# Altium PCB PCB.PcbDoc
Units mil, origin at the board's own origin, x right, y up, seen from the top; angles counter-clockwise.
Board outline 3543.31 x 954.33 mil, 2 copper layers (Top Layer, Bottom Layer); 6 components, 6 nets, 20 pads, 0 vias.
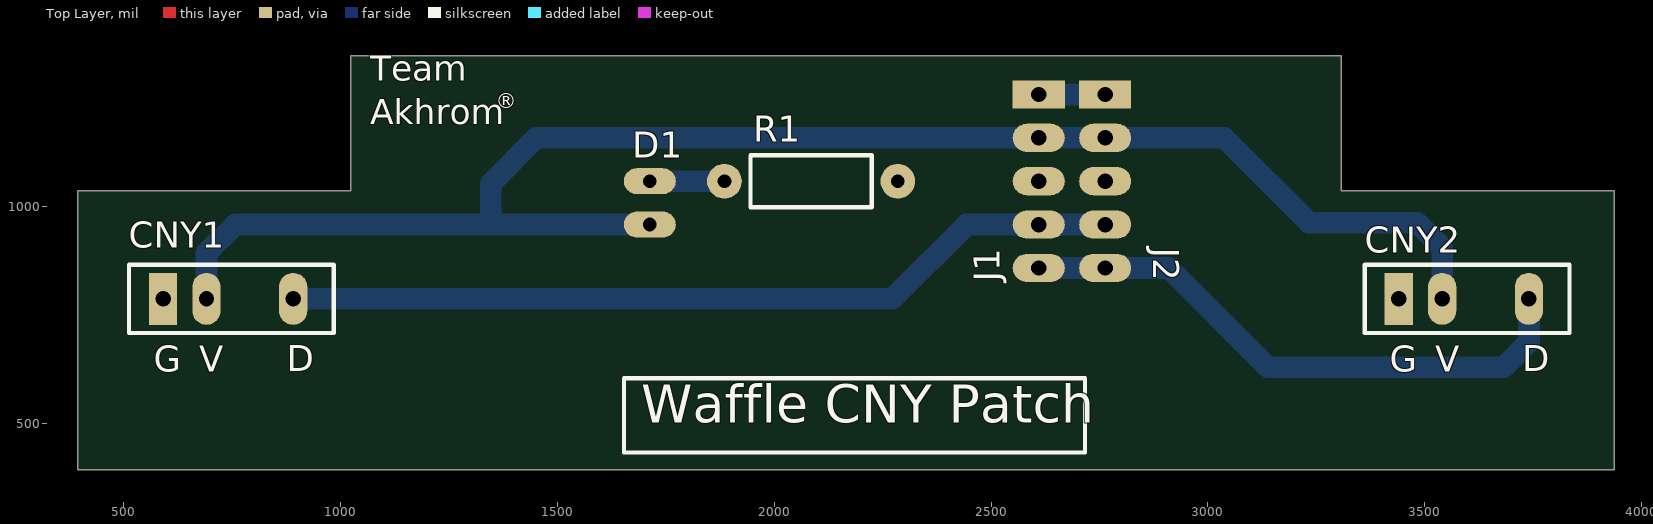
[diagram p0: Top Layer view]
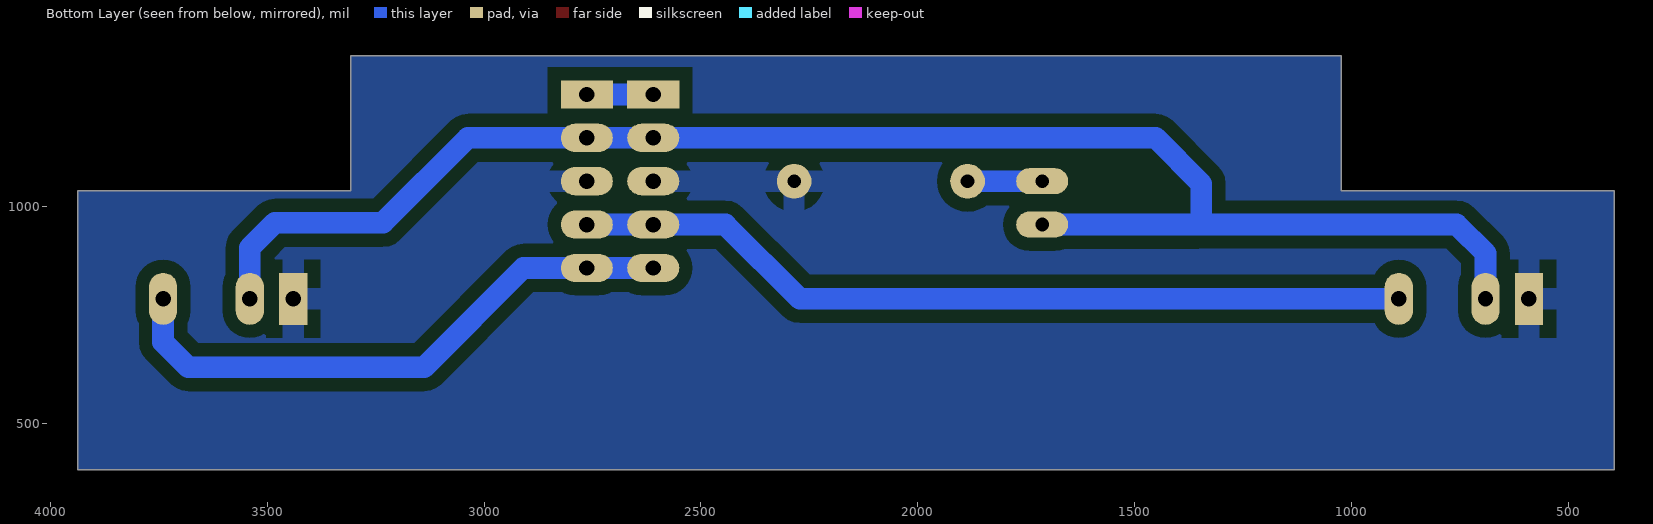
[diagram p1: Bottom Layer view, seen from below]
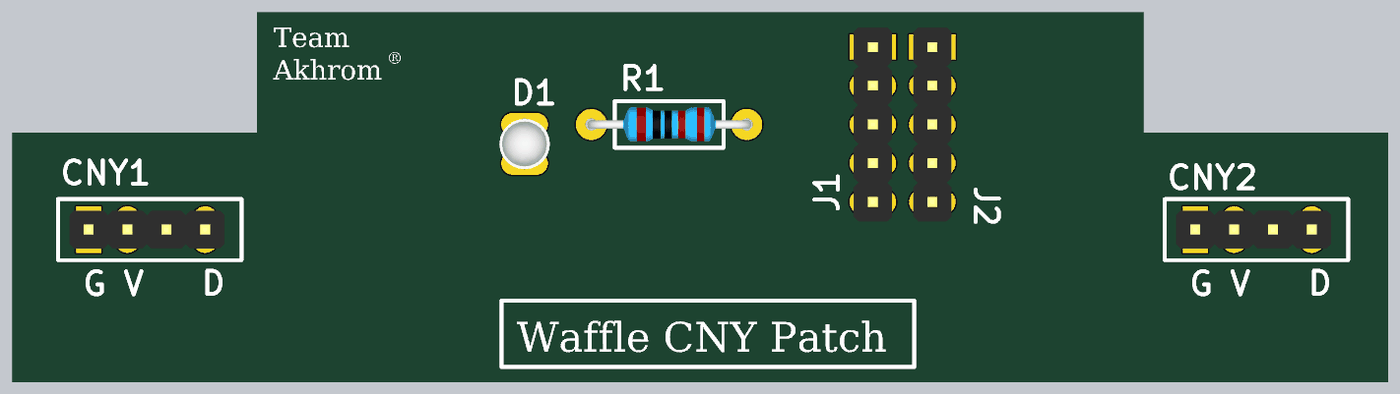
[diagram p2: 3D render of the assembled board from above, using the file's embedded part models]

## Layer stack, top to bottom
Top Solder: solder mask 0.4, Solder Resist, Dk 3.5
Top Layer: signal copper 1.4
Dielectric 1: dielectric 12.6, FR-4, Dk 4.8
Bottom Layer: signal copper 1.4
Bottom Solder: solder mask 0.4, Solder Resist, Dk 3.5

## Board outline
393.7,393.7 393.7,1037.01 1023.62,1037.01 1023.62,1348.03 3307.09,1348.03 3307.09,1037.01 3937.01,1037.01 3937.01,393.7

## Design rules (kind name [scope] priority, off if disabled: settings)
Clearance [All] p1: gap=30
PlaneConnect [All] p1: planeconnectstyle=Relief reliefexpansion=20 reliefentries=4 reliefconductorwidth=30 reliefairgap=30
PolygonConnect [All] p1: connectstyle=Relief reliefconductorwidth=50 reliefentries=4 polygonreliefangle="90 Angle" airgapwidth=30
RoutingVias [All] p1: holewidth=28 width=50 viastyle="Through Hole" minholewidth=28 minwidth=50 maxholewidth=28 maxwidth=50
SolderMaskExpansion [All] p1: expansion=4
Width [All] p1: maxlimit=50 minlimit=30 preferedwidth=30
29 further rules are at their usual default settings.

## Components (designator, comment, footprint, x,y, rotation, side; value= is the part's Value field where it differs from the comment)
CNY1 "CNY_HEADER" CNY_HEADER 740.55,787.4 r90 top
CNY2 "CNY_HEADER" CNY_HEADER 3590.16,787.4 r90 top
D1 "LED" LED-3MM-RED 1712.99,1008.66 r90 top
J1 "PICkit" "Header 1x5" 2609.84,1258.66 r0 top
J2 "PICkit" "Header 1x5" 2762.99,1258.66 r0 top
R1 "RES" RES-Axial-400mil 2285.04,1058.66 r180 top

## Footprints (in the part's own frame and the unit in brackets; to place one, negate y for a bottom-side part, rotate by r counter-clockwise, add the part's x,y. Pads: shape width x height; smd on the part's side, far side on the other; paste and mask are expansions set on the pad)
CNY_HEADER [mil]
  rect 120x65 hole 35.43: 1(0,150)
  oval 120x65 hole 35.43: 2(0,50) 3(0,-150)
  body extent -49,-200 49,200, height 336
"Header 1x5" [mil]
  rect 120x65 hole 35.43: 1(0,0)
  oval 120x65 hole 35.43: 2(0,-100) 3(0,-200) 4(0,-300) 5(0,-400)
  body extent -49,-450 49,50, height 336
LED-3MM-RED [mil]
  oval 60x120 hole 31.5: A(-50,0) K(50,0)
  body extent -66,-65 64,65, height 217
RES-Axial-400mil [mil]
  round 80 hole 31.5: 1(0,0) 2(400,0)
  silkscreen extent 60,-60 340,60, body extent -12,-44 410,44, height 94

## Nets (pads, with @x,y where several pads share a name; then routed paths per layer and width w, separated by ;. In a path a pad name is that pad's centre, name@x,y a point inside that pad or via, vN(x,y) a via of type N, cw(c..) or ccw(c..) an arc to the next point about the centre after c; other vN are vias at no path point)
CNY1: CNY1.3 J1.4 J2.4 | length 1943.4
  Bottom Layer w50: CNY1.3 2272.05,787.4 2443.31,958.66 J1.4 J2.4
CNY2: CNY2.3 J1.5 J2.5 | length 1348.6
  Bottom Layer w50: J1.5 J2.5 2909.05,858.66 3137.8,629.92 3682.28,629.92 3740.16,687.8 CNY2.3
GND: CNY1.1 CNY2.1 J1.3 J2.3 R1.1
NetD1_K: D1.K R1.2 | length 172
  Bottom Layer w50: D1.K R1.2
NetJ1_1: J1.1 J2.1 | length 153.1
  Bottom Layer w50: J1.1 J2.1
VCC: CNY1.2 CNY2.2 D1.A J1.2 J2.2 | length 3709.5
  Bottom Layer w50: CNY1.2 690.55,892.13 757.09,958.66 1346.06,958.66 ; 1351.57,958.66 1346.06,958.66 ; 1351.58,958.66 D1.A ; CNY2.2 3540.16,904.72 3482.28,962.6 3233.07,962.6 3037.01,1158.66 J2.2 J1.2 1451.58,1158.66 1346.06,1053.15 1346.06,958.66

## Polygon pours and split planes (outlines as drawn)
GND on Bottom Layer "B-GND" (solid, remove dead copper, pour order 0): 393.7,1037.01 393.7,393.7 3937.01,393.7 3937.01,1037.01 3307.09,1037.01 3307.09,1348.03 1023.62,1348.03 1023.62,1037.01 393.7,1037.01

## Silkscreen, mask and mechanical layers (free items; w line width, h text height)
Top Overlay:
  lines w10: 511.81,708.66 984.25,708.66 984.25,866.14 511.81,866.14 511.81,708.66 ; 1653.54,433.07 2716.54,433.07 2716.54,603.94 1653.54,603.94 1653.54,433.07 ; 3361.42,708.66 3361.42,866.14 3833.86,866.14 3833.86,708.66 3361.42,708.66
  text "®" at 1357.87,1215.35 h60
  text "Team / Akhrom" at 1068.5,1170.47 h100
  text "D" at 875.2,620.87 h60
  text "D" at 3724.8,620.87 h60
  text "G" at 569.29,619.68 h60
  text "V" at 674.02,619.68 h60
  text "G" at 3418.9,619.68 h60
  text "V" at 3523.62,619.68 h60
  text "Waffle CNY Patch" at 1692.91,472.44 h150
Mechanical 1:
  the board outline again, w10